# Allegro board Medical_Ventilator_VA.brd
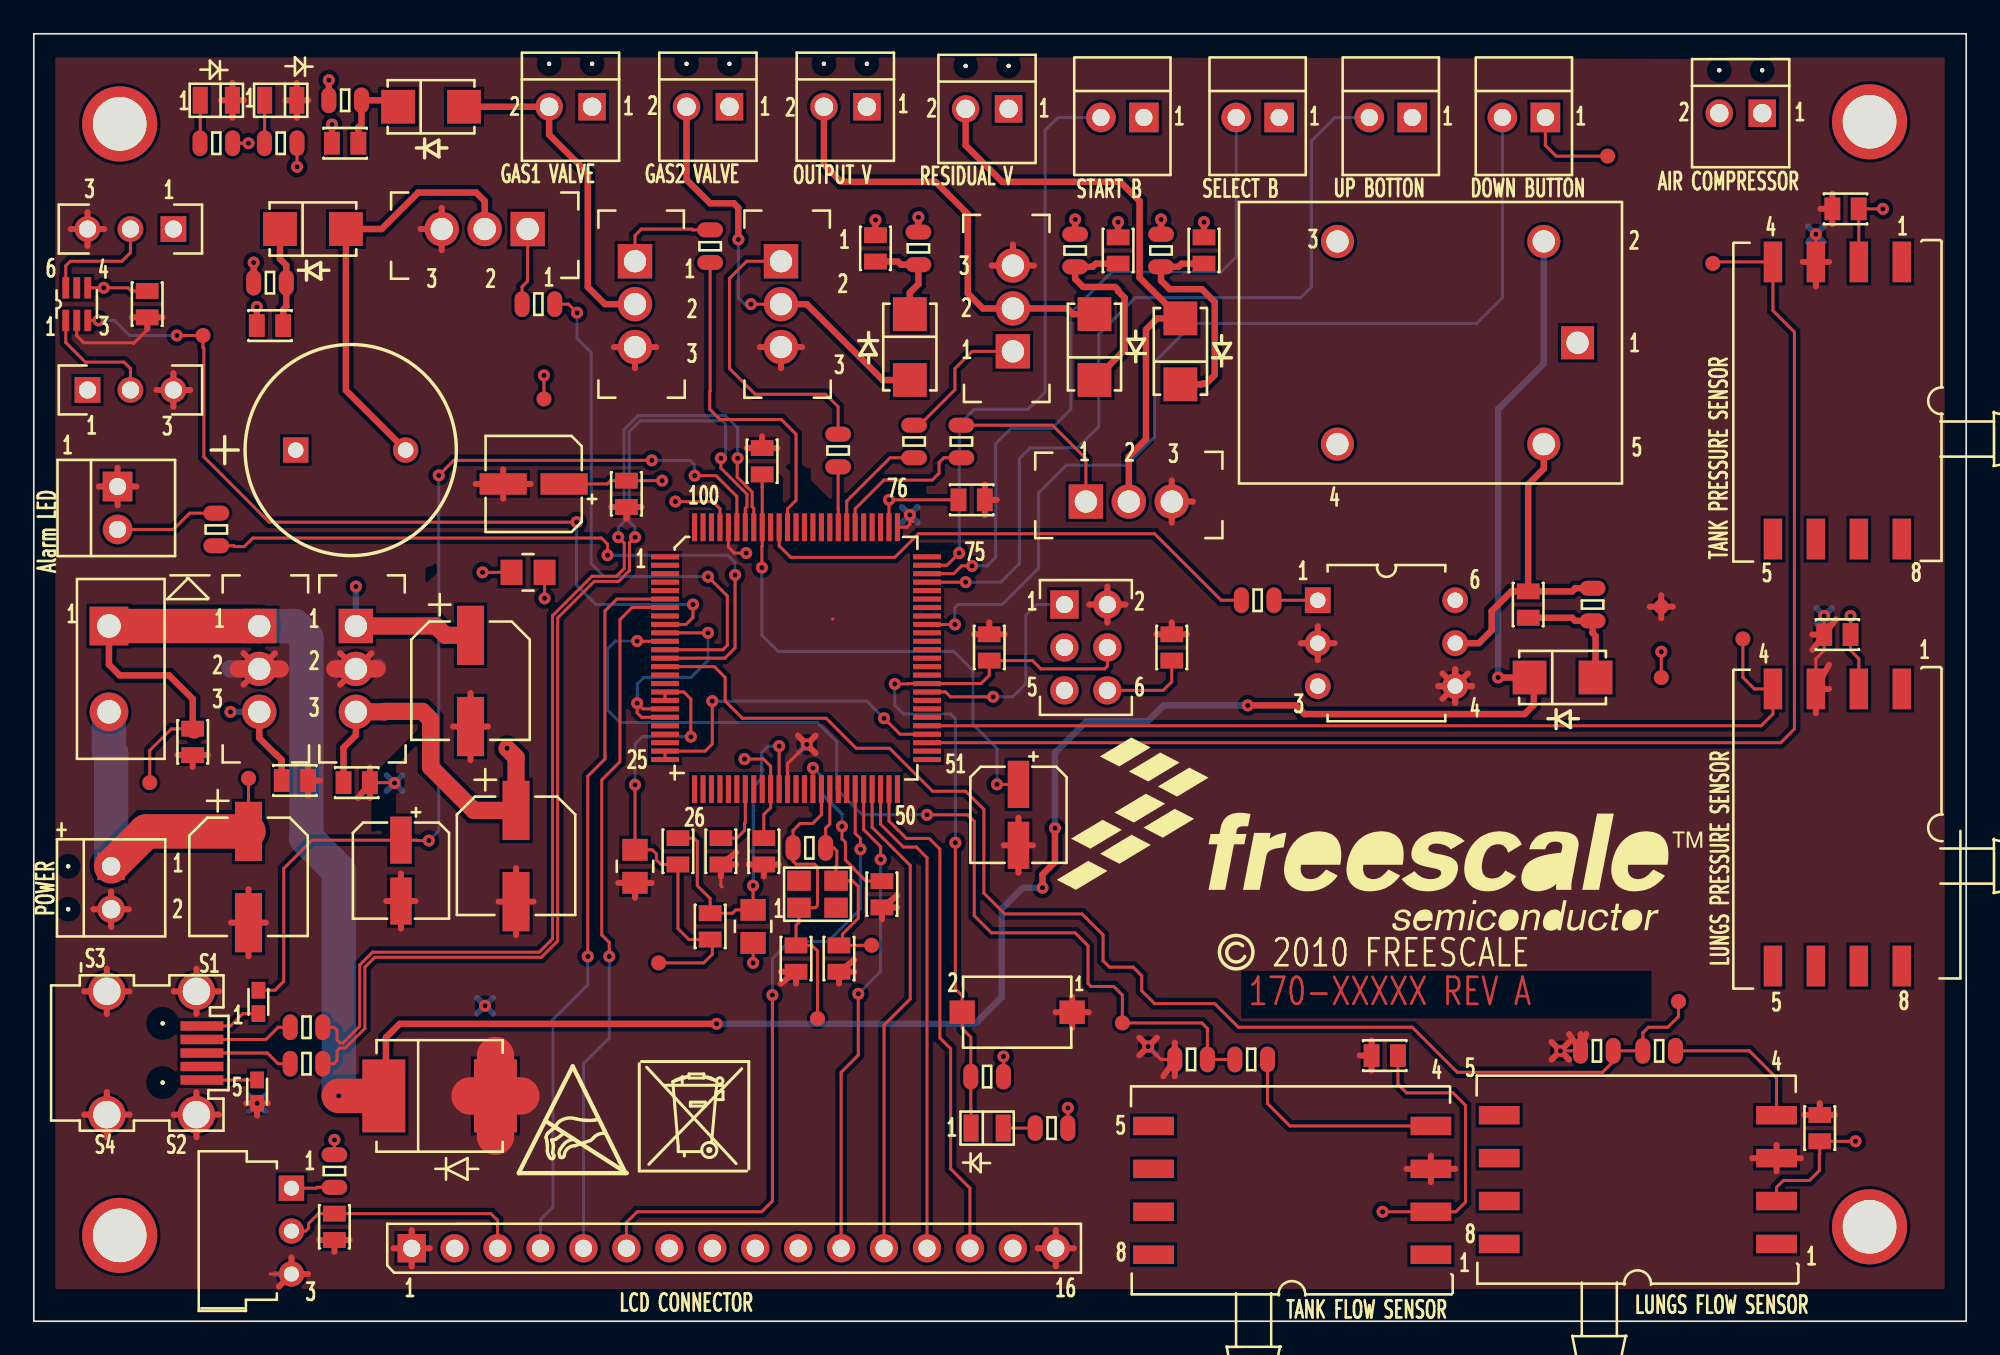
[diagram p0: board, top side]
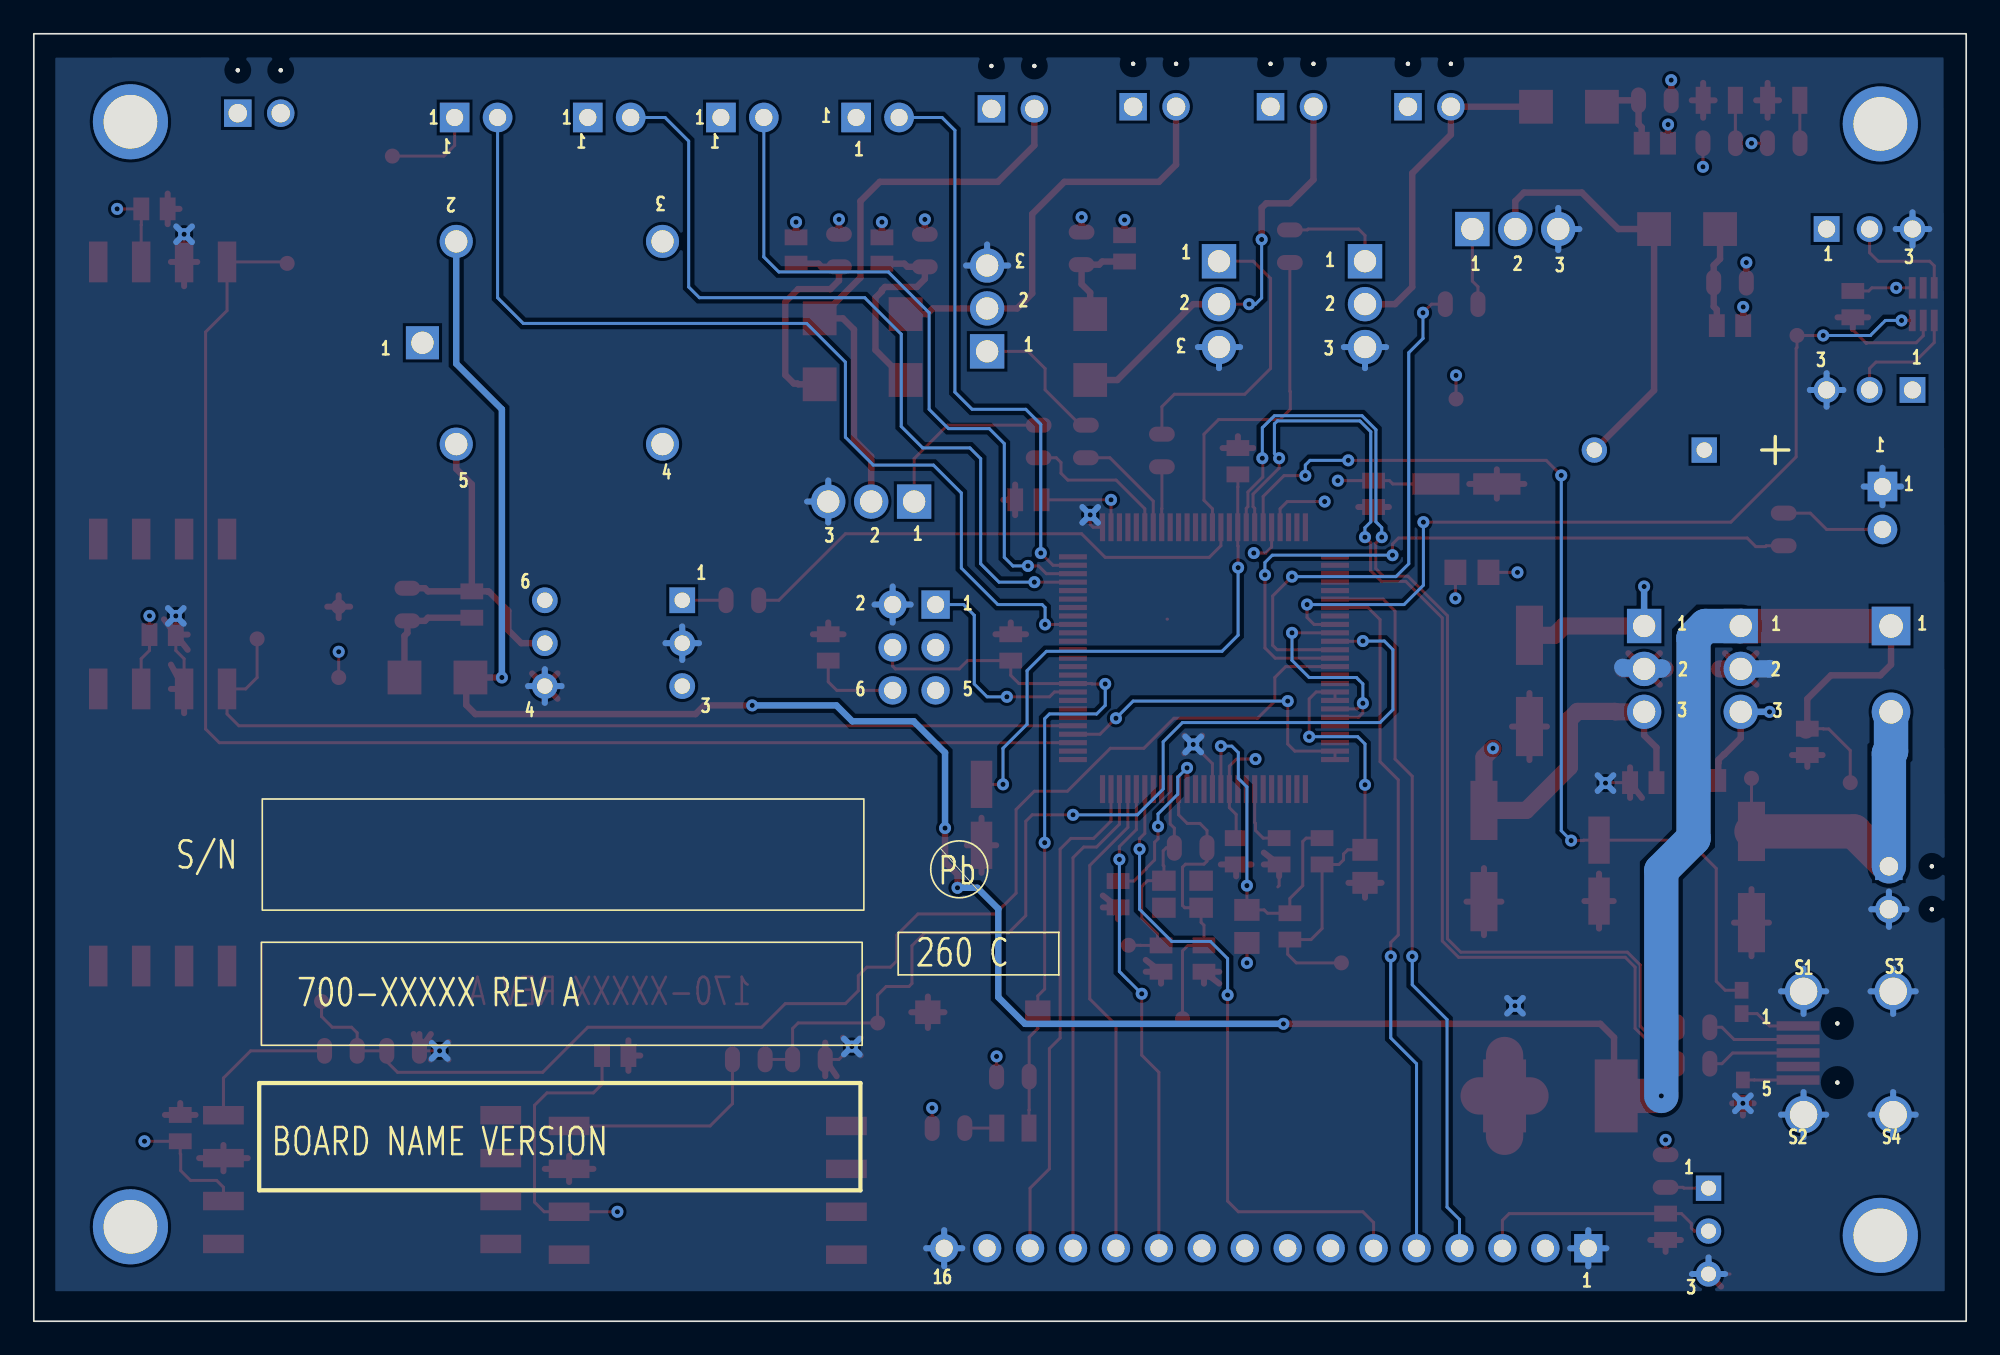
[diagram p1: board, bottom side, seen from below]

Outline 114.3 x 76.2 mm; copper layers: TOP, L2_PWR, L3_PWR, BOTTOM. Coordinates in mm from the lower left corner of the outline.
Outline path: rectangle 0,0 114.3,76.2

## Design rules (mm)
net group DP1: nets USB_IDM USB_IDP

## Placement (name value [footprint] x y rotation side)
BH1  MOUNT_HOLE  [MH175-125P]  108.59 5.59 0 top
BH2  MOUNT_HOLE  [MH175-125P]  5.08 5.08 0 top
BH3  MOUNT_HOLE  [MH175-125P]  108.59 70.99 0 top
BH4  MOUNT_HOLE  [MH175-125P]  5.08 70.87 0 top
C1  47uF  [CCE63X55]  12.7 26.29 270 top
C2  0.1uF  [0805_CC]  15.44 32 0 top
C3  0.1uF  [0805_CC]  19.1 31.88 0 top
C4  10uF  [CCE50X54]  29.57 49.56 180 top
C5  0.1uF  [0805_CC]  55.47 48.62 0 top
C6  0.1uF  [0805_CC]  50.16 25.27 270 top
C7  0.1uF  [0805_CC]  35.05 48.97 270 top
C8  0.1uF  [0805_CC]  40 23.37 270 top
C9  0.01uF  [0805_CC]  38.1 27.81 270 top
C10  0.1uF  [0805_CC]  56.52 39.88 90 top
C11  12pF  [0805_CC]  45.09 21.46 270 top
C12  12pF  [0805_CC]  47.62 21.46 90 top
C13  47uF  [CCE63X55]  25.83 37.9 270 top
C14  47uF  [CCE63X55]  28.52 27.53 270 top
C15  0.1uF  [0805_CC]  9.4 34.29 270 top
C16  0.1uF  [0805_CC]  17.78 5.59 270 top
C17  0.1uF  [0805_CC]  67.31 39.88 90 top
C19  4.7uF  [CCE50X54]  58.24 29.97 270 top
C20  0.1uF  [0805_CC]  43.18 27.81 270 top
C21  0.1uF  [0805_CC]  40.64 27.81 90 top
C22  DNP  [0805_CC]  49.78 63.5 270 top
C23  DNP  [0805_CC]  69.22 63.37 270 top
C24  DNP  [0805_CC]  64.14 63.37 270 top
C25  DNP  [0805_CC]  18.42 69.72 0 top
C26  DNP  [0805_CC]  88.39 42.42 270 top
C27  DNP  [0805_CC]  13.97 58.93 0 top
C28  0.1uF  [0805_CC]  107.16 65.84 180 top
C29  0.1uF  [0805_CC]  106.68 40.64 180 top
C30  0.1uF  [0805_CC]  79.91 15.72 180 top
C31  0.1uF  [0805_CC]  6.71 60.2 270 top
C32  0.1uF  [0805_CC]  105.64 11.43 90 top
C34  4.7uF  [CCE50X54]  21.72 26.67 270 top
C35  0.47uF  [0805_CC]  43.08 50.9 90 top
D8  MBR0520L  [DO214AC_AK]  16.51 64.64 0 top
D9  MBR0520L  [DO214AC_AK]  23.5 71.88 0 top
D10  MBR0520L  [DO214AC_AK]  51.82 57.66 270 top
D11  MBR0520L  [DO214AC_AK]  67.82 57.4 90 top
D12  MBR0520L  [DO214AC_AK]  62.74 57.66 90 top
D13  MBR0520L  [DO214AC_AK]  90.42 38.1 0 top
D14  LED  [LED0805]  56.39 11.43 90 top
D15  LED  [LED0805]  10.79 72.26 270 top
D16  LED  [LED0805]  14.6 72.26 270 top
D17  LED  [HDR102_E]  4.95 49.4 90 top
D18  BYW29E-150  [TO-220-2TH]  4.45 41.15 270 top
D19  SCMJ13A  [DO214AB_SM]  24 13.34 270 top
J1  TB  [CONN_BLOCK_2POS]  4.57 26.92 0 top
J2  TB  [CONN_BLOCK_2POS]  57.66 71.75 270 top
J3  TB  [CONN_BLOCK_2POS]  49.28 71.88 270 top
J4  TB  [CONN_BLOCK_2POS]  41.15 71.88 270 top
J5  TB  [CONN_BLOCK_2POS]  33.02 71.88 270 top
J6  TB  [CONN_BLOCK_2POS]  102.23 71.5 270 top
J12  CON16  [HDR116]  22.35 4.32 90 top
J13  CON_HDR_3X2  [HDR203]  60.96 42.42 0 top
J14  Jumper 3Pin  [HDR103]  3.17 55.12 90 top
J15  Jumper 3Pin  [HDR103]  8.25 64.64 270 top
J16  USB_MINI_B_SKT  [CON_MINIUSB_B]  7.62 15.88 0 top
K1  JSM1_RELAY_5P  [RELAY5_22X16_TH]  91.31 57.91 180 top
L1  100MHZ  [IND_0805]  29.24 44.32 0 top
L2  100MHZ  [IND_0805]  42.54 23.37 270 top
L3  100MHZ  [IND_0805]  35.56 26.92 270 top
L4  260ohm  [IND_0603]  13.21 13.59 90 top
L5  260ohm  [IND_0603]  13.28 18.9 90 top
LS2  BUZZER  [BUZZER_6P5_12X3P8_TH]  15.49 51.56 0 top
NOREF  -  []  35.81 8.89 0 top
NOREF#2  -  []  28.7 9.53 0 top
NOREF#3  -  []  -368.3 -367.16 0 top
NOREF#4  -  []  5.08 1.78 0 top
NOREF#5  -  []  6.35 -36.96 0 top
NOREF#6  -  []  114.3 0 90 top
NOREF#7  -  []  -344.17 158.62 0 top
NOREF#8  -  []  1.63 21.01 328.7 top
NOREF#9  -  []  60.5 26.14 0 top
NOREF#10  -  []  0 76.2 0 top
NOREF#11  -  []  0.38 4.57 0 top
NOREF#12  -  []  71.25 21.97 0 top
NOREF#13  -  []  226.06 -161.42 0 top
NOREF#14  -  []  3.81 3.68 0 top
NOREF#15  -  []  100.97 7.75 180 bottom
Q1  TIPL31C  [TO-220]  62.23 48.51 0 top
Q2  TIPL31C  [TO-220]  57.91 57.4 90 top
Q3  TIPL31C  [TO-220]  44.2 62.74 270 top
Q4  TIPL31C  [TO-220]  35.56 62.74 270 top
Q5  TIPL31C  [TO-220]  29.21 64.64 180 top
R1  4.7K  [RC0805_OV]  56.39 14.48 180 top
R2  330  [RC0805_OV]  60.2 11.43 0 top
R3  1M  [RC0805_OV]  45.87 28.02 0 top
R4  470  [RC0805_OV]  54.86 52.07 90 top
R5  470  [RC0805_OV]  52.07 52.07 90 top
R6  470  [RC0805_OV]  47.57 51.54 90 top
R7  470  [RC0805_OV]  40 63.63 90 top
R8  180  [RC0805_OV]  72.39 42.67 0 top
R9  330  [RC0805_OV]  14.6 69.72 180 top
R10  220  [RC0805_OV]  10.79 69.72 180 top
R11  220  [RC0805_OV]  10.79 46.86 90 top
R12  470  [RC0805_OV]  29.85 60.2 180 top
R13  10K  [RC0805_OV]  17.78 8.89 270 top
R14  POT 10K  [POT3_3352W]  15.24 7.87 270 top
R15  170k  [RC0805_OV]  72.01 15.49 180 top
R16  330k  [RC0805_OV]  68.45 15.49 180 top
R17  0  [RC0805_OV]  52.32 63.5 270 top
R18  0  [RC0805_OV]  66.68 63.37 270 top
R19  0  [RC0805_OV]  61.59 63.37 270 top
R20  0  [RC0805_OV]  18.42 72.26 0 top
R21  0  [RC0805_OV]  92.2 42.42 270 top
R22  0  [RC0805_OV]  13.97 61.47 0 top
R23  170k  [RC0805_OV]  96.14 16 180 top
R24  330k  [RC0805_OV]  92.46 16 180 top
R25  33  [RC0805_OV]  16.13 15.24 180 top
R26  33  [RC0805_OV]  16.13 17.4 180 top
SW1  SW2_STM151XX  [SW2_6P5_6X4]  58.17 18.29 180 top
SW2  SW2_STM151XX  [HDR102_E]  89.41 71.25 0 top
SW3  SW2_STM151XX  [HDR102_E]  81.53 71.25 0 top
SW4  SW2_STM151XX  [HDR102_E]  73.66 71.25 0 top
SW5  SW2_STM151XX  [HDR102_E]  65.66 71.25 0 top
TP18  TEST_POINT  [TESTPOINT_35MIL]  46.35 17.91 0 top
TP19  TEST_POINT  [TESTPOINT_35MIL]  49.56 22.25 0 top
TP20  TEST_POINT  [TESTPOINT_35MIL]  12.7 32.13 0 top
TP21  TEST_POINT  [TESTPOINT_35MIL]  6.86 31.88 0 top
TP22  TEST_POINT  [TESTPOINT_35MIL]  96.27 38.1 0 top
TP23  TEST_POINT  [TESTPOINT_35MIL]  93.09 68.96 0 top
TP24  TEST_POINT  [TESTPOINT_35MIL]  30.18 54.58 0 top
TP25  TEST_POINT  [TESTPOINT_35MIL]  36.96 21.21 0 top
TP26  TEST_POINT  [TESTPOINT_35MIL]  96.27 42.29 0 top
TP27  TEST_POINT  [TESTPOINT_35MIL]  10.01 58.34 0 top
TP28  TEST_POINT  [TESTPOINT_35MIL]  101.09 40.39 0 top
TP29  TEST_POINT  [TESTPOINT_35MIL]  99.31 62.61 0 top
TP30  TEST_POINT  [TESTPOINT_35MIL]  64.39 17.65 0 top
TP31  TEST_POINT  [TESTPOINT_35MIL]  97.28 18.92 0 top
U2  MCF51MM256  [LQFP100_0P5_14X14]  45.09 39.24 0 top
U5  L78S05CV  [TO-220]  13.33 41.15 270 top
U6  TLV2217  [TO-220]  19.05 41.15 270 top
U10  MP3V5050GP  [8PINS_2P54_SM]  106.68 54.48 180 top
U11  MPXV7025DP  [8PINS_2P54_SM]  74.42 7.75 90 top
U12  MP3V5050GP  [8PINS_2P54_SM]  106.68 29.21 180 top
U13  LM94021BIMG  [SC70_6]  2.54 60.2 90 top
U15  4N27M  [DIP6_320]  75.95 42.67 0 top
U16  MPXV7025DP  [8PINS_2P54_SM]  94.87 8.38 90 top
Y2  XTAL_13Y  [XTLOSC4_3P2X2P5MM_SM]  46.35 25.27 0 top

## Library data of the parts
BH1-BH4 = MOUNT_HOLE
C1 C4 C13 C14 C19 C34 = CAP_POL
C2 C3 C5-C12 C15-C17 C20-C32 C35 = MOT_CAP
D8-D13 = DIODE
D14-D17 = LED
D18 = MUR860
D19 = DIODE_TVS
J1-J6 = TB
J12 = CON16
J13 = CON_HDR_3X2
J14 J15 = Jumper 3Pin
J16 = USB_MINI_B_SKT
K1 = JSM1_RELAY_5P
L1-L3 = CDRH5D16NP-4R7N
L4 L5 = INDUCTOR
LS2 = SPEAKER
Q1-Q5 = TIPL751
R1-R13 R15-R26 = RES
R14 = POT
SW1-SW5 = SW2_STM151XX
TP18-TP31 = TEST_POINT: Tolerance: TOLERANCE; User Part Number: USERPART#
U2 = MCF51MM256
U5 U6 = 78XX/TO_1
U10 U12 = MPXV5050GP
U11 U16 = MPXV7025DP
U13 = LM94021_1
U15 = 4N27M
Y2 = XTAL_13Y

## Footprints (pads in the part's own frame, mm; a bottom-side part is the same pattern mirrored in y, then rotated)
8PINS_2P54_SM
  rect 1.092x2.413 smd: 1(-3.81,-8.214) 2(-1.27,-8.214) 3(1.27,-8.214) 4(3.81,-8.214) 5(3.81,8.189) 6(1.27,8.189) 7(-1.27,8.189) 8(-3.81,8.189)
0805_CC
  rect 0.94x1.346 smd: 1(-0.78,0) 2(0.78,0)
BUZZER_6P5_12X3P8_TH
  rect 1.499x1.499 hole 0.914: 1(0,0)
  round 1.499 hole 0.914: 2(6.5,0)
CCE50X54
  rect 2.794x1.27 smd: 1(-1.803,0) 2(1.803,0)
CCE63X55
  rect 3.505x1.6 smd: 1(-2.7,0) 2(2.7,0)
CON_MINIUSB_B
  round 0.254 hole 0.914 unplated: (0,1.75) (0,-1.75)
  rect 2.54x0.559 smd: 1(2.324,1.6) 2(2.324,0.8) 3(2.324,0) 4(2.324,-0.8) 5(2.324,-1.6)
  round 2.21 hole 1.626: S1(1.999,3.65) S2(1.999,-3.65) S3(-3.299,3.65) S4(-3.299,-3.65)
CONN_BLOCK_2POS
  round 0.254 hole 1.092 unplated: (-2.54,0) (-2.54,-2.54)
  rect 1.626x1.626 hole 1.092: 1(0,0)
  round 1.626 hole 1.092: 2(0,-2.54)
DIP6_320
  rect 1.524x1.524 hole 0.914: 1(0,0)
  round 1.524 hole 0.914: 2(0,-2.54) 3(0,-5.08) 4(8.128,-5.08) 5(8.128,-2.54) 6(8.128,0)
DO214AB_SM
  rect 4.318x2.54 smd: 1(0,-3.302) 2(0,3.302)
DO214AC_AK
  rect 1.999x1.999 smd: 1(-1.951,0) 2(1.951,0)
HDR102_E
  rect 1.753x1.753 hole 1.016: 1(0,0)
  round 1.753 hole 1.016: 2(-2.54,0)
HDR103
  rect 1.524x1.524 hole 1.016: 1(0,0)
  round 1.524 hole 1.016: 2(0,-2.54) 3(0,-5.08)
HDR116
  rect 1.676x1.676 hole 1.016: 1(0,0)
  round 1.676 hole 1.016: 2(0,-2.54) 3(0,-5.08) 4(0,-7.62) 5(0,-10.16) 6(0,-12.7) 7(0,-15.24) 8(0,-17.78) 9(0,-20.32) 10(0,-22.86) 11(0,-25.4) 12(0,-27.94) 13(0,-30.48) 14(0,-33.02) 15(0,-35.56) 16(0,-38.1)
HDR203
  rect 1.676x1.676 hole 1.016: 1(0,0)
  round 1.676 hole 1.016: 2(2.54,0) 3(0,-2.54) 4(2.54,-2.54) 5(0,-5.08) 6(2.54,-5.08)
IND_0603
  rect 0.991x0.813 smd: 1(-0.691,0) 2(0.691,0)
IND_0805
  rect 1.295x1.499 smd: 1(-0.978,0) 2(0.978,0)
LED0805
  rect 1.6x0.889 smd: 1(0,0.953) 2(0,-0.953)
LQFP100_0P5_14X14
  rect 1.651x0.305 smd: 1(-7.75,5.999) 2(-7.75,5.499) 3(-7.75,5.001) 4(-7.75,4.501) 5(-7.75,4) 6(-7.75,3.5) 7(-7.75,3) 8(-7.75,2.499) 9(-7.75,1.999) 10(-7.75,1.501) 11(-7.75,1.001) 12(-7.75,0.5) 13(-7.75,0) 14(-7.75,-0.5) 15(-7.75,-1.001) 16(-7.75,-1.501) 17(-7.75,-1.999) 18(-7.75,-2.499) 19(-7.75,-3) 20(-7.75,-3.5) 21(-7.75,-4) 22(-7.75,-4.501) 23(-7.75,-5.001) 24(-7.75,-5.499) 25(-7.75,-5.999) 51(7.75,-5.999) 52(7.75,-5.499) 53(7.75,-5.001) 54(7.75,-4.501) 55(7.75,-4) 56(7.75,-3.5) 57(7.75,-3) 58(7.75,-2.499) 59(7.75,-1.999) 60(7.75,-1.501) 61(7.75,-1.001) 62(7.75,-0.5) 63(7.75,0) 64(7.75,0.5) 65(7.75,1.001) 66(7.75,1.501) 67(7.75,1.999) 68(7.75,2.499) 69(7.75,3) 70(7.75,3.5) 71(7.75,4) 72(7.75,4.501) 73(7.75,5.001) 74(7.75,5.499) 75(7.75,5.999)
  rect 0.305x1.651 smd: 26(-5.999,-7.75) 27(-5.499,-7.75) 28(-5.001,-7.75) 29(-4.501,-7.75) 30(-4,-7.75) 31(-3.5,-7.75) 32(-3,-7.75) 33(-2.499,-7.75) 34(-1.999,-7.75) 35(-1.501,-7.75) 36(-1.001,-7.75) 37(-0.5,-7.75) 38(0,-7.75) 39(0.5,-7.75) 40(1.001,-7.75) 41(1.501,-7.75) 42(1.999,-7.75) 43(2.499,-7.75) 44(3,-7.75) 45(3.5,-7.75) 46(4,-7.75) 47(4.501,-7.75) 48(5.001,-7.75) 49(5.499,-7.75) 50(5.999,-7.75) 76(5.999,7.75) 77(5.499,7.75) 78(5.001,7.75) 79(4.501,7.75) 80(4,7.75) 81(3.5,7.75) 82(3,7.75) 83(2.499,7.75) 84(1.999,7.75) 85(1.501,7.75) 86(1.001,7.75) 87(0.5,7.75) 88(0,7.75) 89(-0.5,7.75) 90(-1.001,7.75) 91(-1.501,7.75) 92(-1.999,7.75) 93(-2.499,7.75) 94(-3,7.75) 95(-3.5,7.75) 96(-4,7.75) 97(-4.501,7.75) 98(-5.001,7.75) 99(-5.499,7.75) 100(-5.999,7.75)
MH175-125P
  round 4.445 hole 3.175: 1(0,0)
POT3_3352W
  rect 1.499x1.499 hole 0.889: 1(0,0)
  round 1.499 hole 0.889: 2(2.54,0) 3(5.08,0)
RC0805_OV
  oval 0.889x1.524 smd: 1(-0.965,0) 2(0.965,0)
RELAY5_22X16_TH
  rect 1.956x1.956 hole 1.321: 1(0,0)
  round 1.956 hole 1.321: 2(1.999,-5.999) 3(14.201,-5.999) 4(14.201,5.999) 5(1.999,5.999)
SC70_6
  rect 1.27x0.406 smd: 1(-0.965,0.65) 2(-0.965,0) 3(-0.965,-0.65) 4(0.965,-0.65) 5(0.965,0) 6(0.965,0.65)
SW2_6P5_6X4
  rect 1.499x1.397 smd: 1(-3.251,0) 2(3.251,0)
TESTPOINT_35MIL
  round 0.889 smd: 1(0,0)
TO-220
  rect 2.032x2.032 hole 1.321: 1(0,0)
  round 2.032 hole 1.321: 2(2.54,0) 3(5.08,0)
TO-220-2TH
  rect 2.286x2.286 hole 1.397: 1(0,0)
  round 2.286 hole 1.397: 3(5.08,0)
XTLOSC4_3P2X2P5MM_SM
  rect 1.397x1.194 smd: 1(-1.1,-0.8) 2(1.1,-0.8) 3(1.1,0.8) 4(-1.1,0.8)

## Nets
3.3V: C3.1 C14.1 C27.1 C28.1 C29.1 C31.1 J14.1(PIN1) J15.1(PIN1) L1.1 LS2.1 R2.2 R10.1 R22.1 SW2.1(SW1) SW3.1(SW1) SW4.1(SW1) SW5.1(SW1) TP23.1 U6.3(VOUT) U10.2(VS) U12.2(VS) U13.4(VDD)
3VDPS: R15.2 R16.1 TP30.1 U2.11(PTA4/INP1+)
3VDPS2: R23.2 R24.1 TP31.1 U2.14(PTA7/INP2+)
5V: C2.1 C13.1 C22.1 C23.1 C24.1 C25.1 C30.1 C32.1 J2.1 J3.1 J4.1 J5.1 J12.2 J12.15 R9.1 R13.1 R17.1 R18.1 R19.1 R20.1 TP22.1 U5.3(VOUT) U6.1(VIN) U11.2(VS) U16.2(VS)
12V: C15.1 D13.1(CATHODE) D18.1(CATHODE) D19.1(C) K1.2(COIL1) TP21.1 U5.1(VIN)
GND_FIELD SIGNAL: C8.2 C9.2 L3.1 TP25.1 U2.17(VSSA) U2.18(VREFL)
GND_POWER: C1.2 C2.2 C3.2 C4.2 C5.2 C6.2 C7.2 C10.2 C11.2 C12.1 C13.2 C14.2 C15.2 C16.2 C17.2 C19.2 C20.2 C21.1 C28.2 C29.2 C30.2 C31.2 C32.2 C34.2 C35.2 D15.1(CATHODE) D16.1(CATHODE) D17.1(CATHODE) D19.2(A) J1.2 J12.1 J12.16 J13.2 J14.3(PIN3) J15.3(PIN3) J16.S1(SHLD1) J16.S2(SHLD2) J16.S3(SHLD3) J16.S4(SHLD4) L3.2 L4.1 Q1.3(E) Q2.3(E) Q3.3(E) Q4.3(E) Q5.3(E) R14.3(B) R16.2 R24.2 SW1.1(SW1) TP26.1 U2.37(VSS2) U2.76(VSS3) U2.96(VSS1) U5.2(GND) U6.2(GND) U10.3(GND) U11.3(GND) U12.3(GND) U13.2(GND) U15.2(CATHODE) U15.4(EMITTER) U16.3(GND)
V0: C16.1 J12.3 R14.2(WIPER)
VBAT: C1.1 D18.3(ANODE) J1.1 TP20.1
2: Y2.2
4: Y2.4
ALARM: R11.1 U2.13(PTA6)
BKGD: J13.1 U2.59(PTD0/BKGD/MS)
BUTTON1: SW2.2(SW2) U2.67(PTE0/KBI2P3/FB_ALE/FB_CS1)
BUTTON2: SW3.2(SW2) U2.72(PTE1/KBI2P4/RGPIOP13/FB_AD6)
BUTTON3: SW4.2(SW2) U2.73(PTE2/KBI2P5/RGPIOP14/FB_AD7)
BUTTON4: SW5.2(SW2) U2.74(PTE3/KBI2P6/FB_AD8)
BUZZ: R12.1 U2.12(PTA5)
COMPR: R8.1 U2.90(PTF4/SDA/FB_D4/FB_AD10)
DB4: J12.11 U2.46(PTH3/RGPIOP3/FB_D6)
DB5: J12.12 U2.47(PTH4/RGPIOP4/FB_D5)
DB6: J12.13 U2.48(PTH5/RGPIOP5/FB_D4)
DB7: J12.14 U2.49(PTH6/RGPIOP6/FB_D3)
DPS: U2.10(PTA3/KBI1P2/FB_D6/ADP5) U2.19(INP1-) U2.20(OUT1)
DPS2: U2.24(INP2-) U2.25(OUT2) U2.54(PTC3/KBI1P6/SS2/ADP7)
E: J12.6 U2.45(PTH2/RGPIOP2/FB_D7)
EXTAL2: C11.1 R3.1 TP18.1 U2.41(PTB4/EXTAL2) Y2.1
GAS1: R4.1 U2.81(PTF0/USB_ID/TPM2CH2)
GAS2: R5.1 U2.82(PTF1/RX2/USB_DP_DOWN/TPM2CH1)
GS0: J14.2(PIN2) U13.1(GS0)
GS1: J15.2(PIN2) U13.6(GS1)
MCU 3.3V: C4.1 C5.1 C6.1 C7.1 C17.1 C20.1 J13.6 L1.2 L2.2 R1.1 TP24.1 U2.35(VREFH) U2.40(VDD2) U2.77(VDD3) U2.97(VDD1)
MCU_RESET: C10.1 D14.1(CATHODE) J13.4 R1.2 SW1.2(SW2) U2.60(PTD1/CMPP2/RESET)
OUTPUT: R6.1 U2.83(PTF2/TX2/USB_DM_DOWN/TPM2CH0)
P1S: TP29.1 U2.53(PTC2/KBI1P5/SPSCK2/ADP6) U10.4(VOUT)
P2S: TP28.1 U2.55(PTC4/KBI1P7/CMPP0/ADP8) U12.4(VOUT)
R/W: J12.5 U2.7(PTH1/FB_D0)
RESIDUAL: R7.1 U2.89(PTF3/SCL/FB_D5/FB_AD11)
RS: J12.4 U2.6(PTH0/FB_OE_B)
TEMP: TP27.1 U2.9(PTA2/KBI1P1/RX1/ADP4) U13.3(OUT)
USB_IDM: R26.1 U2.93(USB_DM)
USB_IDP: R25.1 U2.94(USB_DP)
V_USB_BUS: C34.1 L5.2 U2.95(VBUS)
VUSB33: C19.1 C35.1 U2.92(VUSB33)
XTAL2: C12.2 R3.2 TP19.1 U2.42(PTB5/XTAL2) Y2.3
N07061: C8.1 C9.1 L2.1 U2.36(VDDA)
N11863: Q1.1(B) R4.2
N11999: D11.2(ANODE) J2.2 Q1.2(C)
N12118: Q2.1(B) R5.2
N12172: D12.2(ANODE) J3.2 Q2.2(C)
N12672: Q3.1(B) R6.2
N12726: D10.2(ANODE) J4.2 Q3.2(C)
N12762: Q4.1(B) R7.2
N12800: D9.2(ANODE) J5.2 Q4.2(C)
N13430: R8.2 U15.1(ANODE)
N14080: J6.1 K1.1(COMMON)
N16404: D17.2(ANODE) R11.2
N17031: Q5.1(B) R12.2
N18492: R15.1 U11.4(VOUT)
N6844012: R13.2 R14.1(A)
N6860008: C21.2 U2.32(VREFO)
N6863643: D8.2(ANODE) LS2.2 Q5.2(C)
N6899722: D14.2(ANODE) R2.1
N6899921: D15.2(ANODE) R10.2
N6900064: D16.2(ANODE) R9.2
N6911656: J6.2 K1.3(NO)
N6937956: C22.2 D10.1(CATHODE) R17.2
N6938317: C23.2 D11.1(CATHODE) R18.2
N6938790: C24.2 D12.1(CATHODE) R19.2
N6939061: C25.2 D9.1(CATHODE) R20.2
N6940286: C26.1 K1.5(COIL2) R21.1 U15.5(COLLECTOR)
N6940870: C26.2 D13.2(ANODE) R21.2
N6942152: C27.2 D8.1(CATHODE) R22.2
N6970603: R23.1 U16.4(VOUT)
N6984290: J16.3(D+) R25.2
N6984322: J16.2(D-) R26.2
N6984489: J16.5(GND1) L4.2
N6985280: J16.1(VBUS) L5.1

Pads without a net: BH1 1; BH2 1; BH3 1; BH4 1; J12 7 8 9 10; J13 3 5; J16 4; K1 4; U2 1 2 3 4 5 8 15 16 21 22 23 26 27 28 29 30 31 33 34 38 39 43 44 50 51 52 56 57 58 61 62 63 64 65 66 68 69 70 71 75 78 79 80 84 85 86 87 88 91 98 99 100; U10 1 5 6 7 8; U11 1 5 6 7 8; U12 1 5 6 7 8; U13 5; U15 3 6; U16 1 5 6 7 8

## Via types
v1: diameter 0.711, hole 0.305, TOP to BOTTOM, 93 vias

## Routing (per net, layer and track width the routed paths; a pad name or vN(x,y) marks a point on that pad's centre or on a via; arc(x,y) is an arc through that point)
3.3V: length 99.6
  TOP w0.178: C31.1 5.76,60.98 5.58,61.16 v1(4.14,61.16) U13.4 ; R2.2 v1(61.16,12.62) ; v1(109.37,65.84) C28.1 107.94,64.89 107.95,64.89 U10.2 ; U12.2 107.95,39.21 107.46,39.7 C29.1 v1(107.46,41.74) ; R10.1 v1(12.7,69.72) ; L1.1 v1(26.54,44.32) ; TP23.1 90.04,68.96 89.41,69.6 SW2.1
  TOP w0.381: R22.1 v1(13,62.66) ; C27.1 v1(13.19,60.03) ; C3.1 18.32,33.95 19.05,34.68 U6.3
  TOP w1.016: U6.3 20.75,36.07 20.78,36.09 22.99,36.09 23.47,35.61 23.47,32.79 26.03,30.23 C14.1 28.52,33.38 v1(27.99,33.91)
  L2_PWR w0.178: 8.25,63.65 J15.1 ; J15.1 9.25,64.64 ; J15.1 7.26,64.64 ; J15.1 8.25,65.64 ; 12.54,62.2 v1(13,62.66) ; v1(13,62.66) 13.47,63.13 ; v1(13,62.66) 12.54,63.13 ; v1(13,62.66) 13.47,62.2 ; 80.43,71.25 SW3.1 ; SW3.1 81.53,70.14 ; SW3.1 82.64,71.25 ; SW3.1 81.53,72.35 ; 26.08,44.79 v1(26.54,44.32) ; v1(26.54,44.32) 27.01,44.79 ; v1(26.54,44.32) 26.08,43.86 ; v1(26.54,44.32) 27.01,43.86 ; 108.91,65.37 v1(109.37,65.84) ; v1(109.37,65.84) 109.84,66.3 ; v1(109.37,65.84) 108.91,66.3 ; v1(109.37,65.84) 109.84,65.37 ; J14.1 3.17,56.11 ; J14.1 2.18,55.12 ; J14.1 3.17,54.12 ; J14.1 4.17,55.12 ; SW5.1 65.66,72.35 ; SW5.1 65.66,70.14 ; SW5.1 64.55,71.25 ; SW5.1 66.77,71.25 ; 27.53,33.44 v1(27.99,33.91) ; v1(27.99,33.91) 27.53,34.37 ; v1(27.99,33.91) 28.46,33.44 ; v1(27.99,33.91) 28.46,34.37 ; 3.68,61.63 v1(4.14,61.16) ; v1(4.14,61.16) 3.68,60.7 ; v1(4.14,61.16) 4.61,61.63 ; v1(4.14,61.16) 4.61,60.7 ; v1(13.19,60.03) 13.66,60.5 ; v1(13.19,60.03) 13.66,59.57 ; v1(13.19,60.03) 12.73,60.5 ; v1(13.19,60.03) 12.73,59.57 ; SW4.1 73.66,72.35 ; SW4.1 73.66,70.14 ; SW4.1 74.77,71.25 ; SW4.1 72.55,71.25 ; 12.24,70.19 v1(12.7,69.72) ; v1(12.7,69.72) 12.24,69.26 ; v1(12.7,69.72) 13.16,69.26 ; v1(12.7,69.72) 13.16,70.19 ; v1(107.46,41.74) 107.92,42.21 ; v1(107.46,41.74) 106.99,41.28 ; v1(107.46,41.74) 106.99,42.21 ; v1(107.46,41.74) 107.92,41.28 ; 15.49,50.58 LS2.1 ; LS2.1 16.47,51.56 ; LS2.1 15.49,52.54 ; LS2.1 14.51,51.56 ; 88.3,71.25 SW2.1 ; SW2.1 89.41,72.35 ; SW2.1 90.52,71.25 ; SW2.1 89.41,70.14 ; 60.7,13.09 v1(61.16,12.62) ; v1(61.16,12.62) 61.63,13.09 ; v1(61.16,12.62) 60.7,12.16 ; v1(61.16,12.62) 61.63,12.16
3VDPS: length 61.2
  TOP w0.178: v1(52.83,29.97) 55.24,29.97 55.63,29.59 55.63,24 56.64,22.99 61.59,22.99 62.36,22.22 62.36,19.99 62.53,19.81 63.88,19.81 64.39,19.3 TP30.1 69.09,17.65 69.42,17.32 R16.1 R15.2 ; v1(35.69,40.26) 35.7,40.24 U2.11
  BOTTOM w0.178: v1(35.69,40.26) 34.42,40.26 33.91,39.75 33.91,36.2 34.67,35.43 46.35,35.43 47.5,34.29 47.5,31.5 49.02,29.97 v1(52.83,29.97)
3VDPS2: length 78.3
  TOP w0.178: U2.14 40.25,38.74 40.89,38.1 40.89,36.7 41.91,35.69 46.86,35.69 48.64,33.91 50.62,33.91 53.16,31.37 55.12,31.37 56.2,30.29 56.2,25.34 57.43,24.1 62,24.1 63.25,22.86 63.25,21.34 63.63,20.95 65.02,20.95 65.53,20.45 65.53,19.56 66.29,18.8 69.85,18.8 71.25,17.4 81.53,17.4 84.2,14.73 92.79,14.73 93.42,15.37 R24.1 R23.2 95.17,17.07 95.5,17.4 96.65,17.4 97.28,18.03 TP31.1
5V: length 122.7
  TOP w0.178: TP22.1 v1(96.27,39.62) ; R9.1 v1(15.57,68.33) ; R13.1 v1(17.78,10.73) ; v1(79.78,6.48) U11.2 84.11,6.48 84.68,7.05 84.68,12.78 83.95,13.51 81.2,13.51 80.69,14.03 C30.1 ; v1(107.75,10.65) C32.1 105.64,9.91 105.61,9.89 105.61,8.92 105.03,8.33 103.49,8.33 103.08,7.93 U16.2
  TOP w0.381: R20.1 v1(17.45,73.46) ; C23.1 v1(69.22,65.05) ; R18.1 v1(66.68,65.21) ; R17.1 v1(52.32,65.34) ; C22.1 v1(49.78,65.18) ; R19.1 v1(61.59,65.21) ; C2.1 14.66,33.05 14.66,33.06 14.66,33.22 14.33,33.55 14.3,33.55 13.33,34.52 U5.3 ; C24.1 v1(64.14,65.05) ; C25.1 v1(17.64,70.83)
  TOP w1.016: C13.1 24.35,40.6 23.79,41.15 U6.1
  L3_PWR w0.178: v1(49.78,65.18) 50.25,65.65 ; v1(49.78,65.18) 50.25,64.72 ; v1(49.78,65.18) 49.32,65.65 ; v1(49.78,65.18) 49.32,64.72 ; 56.61,71.75 J2.1 ; J2.1 57.66,70.71 ; J2.1 58.7,71.75 ; J2.1 57.66,72.8 ; v1(79.78,6.48) 80.25,6.94 ; v1(79.78,6.48) 79.32,6.94 ; v1(79.78,6.48) 79.32,6.01 ; v1(79.78,6.48) 80.25,6.01 ; v1(66.68,65.21) 67.14,65.68 ; v1(66.68,65.21) 67.14,64.75 ; v1(66.68,65.21) 66.21,65.68 ; v1(66.68,65.21) 66.21,64.75 ; v1(19.05,43.48) 19.51,43.95 ; v1(19.05,43.48) 18.59,43.02 ; v1(19.05,43.48) 19.51,43.02 ; v1(19.05,43.48) 18.59,43.95 ; v1(17.45,73.46) 17.91,73.92 ; v1(17.45,73.46) 16.98,72.99 ; v1(17.45,73.46) 16.98,73.92 ; v1(17.45,73.46) 17.91,72.99 ; v1(107.75,10.65) 108.22,11.12 ; v1(107.75,10.65) 108.22,10.19 ; v1(107.75,10.65) 107.29,11.12 ; v1(107.75,10.65) 107.29,10.19 ; v1(96.27,39.62) 96.73,39.16 ; v1(96.27,39.62) 95.8,40.09 ; v1(96.27,39.62) 95.8,39.16 ; v1(96.27,39.62) 96.73,40.09 ; 63.67,64.59 v1(64.14,65.05) ; v1(64.14,65.05) 64.6,65.52 ; v1(64.14,65.05) 63.67,65.52 ; v1(64.14,65.05) 64.6,64.59 ; 40.1,71.88 J4.1 ; J4.1 42.19,71.88 ; J4.1 41.15,70.84 ; J4.1 41.15,72.93 ; v1(17.78,10.73) 18.24,11.2 ; v1(17.78,10.73) 17.32,11.2 ; v1(17.78,10.73) 17.32,10.27 ; v1(17.78,10.73) 18.24,10.27 ; J5.1 33.02,72.93 ; J5.1 31.98,71.88 ; J5.1 34.06,71.88 ; J5.1 33.02,70.84 ; v1(69.22,65.05) 69.68,64.59 ; v1(69.22,65.05) 68.75,64.59 ; v1(69.22,65.05) 68.75,65.52 ; v1(69.22,65.05) 69.68,65.52 ; 15.11,68.79 v1(15.57,68.33) ; v1(15.57,68.33) 15.11,67.86 ; v1(15.57,68.33) 16.04,68.79 ; v1(15.57,68.33) 16.04,67.86 ; U6.1 20.3,41.15 ; U6.1 17.8,41.15 ; U6.1 19.05,42.4 ; 61.13,65.68 v1(61.59,65.21) ; v1(61.59,65.21) 62.06,65.68 ; v1(61.59,65.21) 61.13,64.75 ; v1(61.59,65.21) 62.06,64.75 ; v1(17.64,70.83) 18.1,70.36 ; v1(17.64,70.83) 18.1,71.29 ; v1(17.64,70.83) 17.17,71.29 ; v1(17.64,70.83) 17.17,70.36 ; 57.91,3.25 J12.15 ; J12.15 58.98,4.32 ; J12.15 57.91,5.39 ; J12.15 56.84,4.32 ; 11.17,36.53 v1(11.63,36.07) ; v1(11.63,36.07) 11.17,35.6 ; v1(11.63,36.07) 12.1,36.53 ; v1(11.63,36.07) 12.1,35.6 ; J12.2 24.89,5.39 ; J12.2 23.82,4.32 ; J12.2 24.89,3.25 ; J12.2 25.96,4.32 ; 14.58,36.07 U5.3 13.33,34.82 ; v1(52.32,65.34) 52.79,65.81 ; v1(52.32,65.34) 51.86,65.81 ; v1(52.32,65.34) 51.86,64.88 ; v1(52.32,65.34) 52.79,64.88 ; J3.1 50.32,71.88 ; J3.1 48.23,71.88 ; J3.1 49.28,70.84 ; J3.1 49.28,72.93
  BOTTOM w0.381: U6.1 v1(19.05,43.48) ; U5.3 v1(11.63,36.07)
12V: length 175.3
  TOP w0.178: TP21.1 6.86,33.78 8.13,35.05 8.44,35.05 8.46,35.07 C15.1
  TOP w0.381: C15.1 9.4,36.83 8,38.23 5.08,38.23 4.45,38.86 D18.1 ; v1(71.81,36.45) 74.64,36.45 75.16,35.93 88.18,35.93 88.72,36.47 88.72,37.85 D13.1 v1(86.61,38.1) ; v1(60.4,29.18) 60.4,27.18 59.66,26.44 v1(59.66,25.65) ; v1(40.39,17.6) 21.64,17.6 20.83,16.79 20.83,13.46
  TOP w1.016: 20.83,13.46 D19.1 ; 9.48,34.99 C15.1
  TOP w2.032: D19.1 v1(18.03,13.34) ; D18.1 U5.1
  BOTTOM w0.381: K1.2 89.31,56.68 86.61,53.98 v1(86.61,38.1) ; v1(60.4,29.18) 60.4,33.66 62.26,35.51 65.89,35.51 66.83,36.45 v1(71.81,36.45) ; v1(59.66,25.65) 58.5,25.65 57.25,24.41 57.25,19.18 55.68,17.6 v1(40.39,17.6)
  BOTTOM w2.032: v1(18.03,13.34) 18.03,26.67 16.13,28.57 16.13,40.44 15.42,41.15 U5.1 13.35,41.14
GND_FIELD SIGNAL: length 27.6
  TOP w0.178: U2.18 U2.17 38.45,37.24 38.86,36.83 v1(38.86,34.59) ; TP25.1 39.62,21.21 40.13,21.72 40.13,22.46 C8.2 38.75,22.59 38.1,23.24 C9.2 37.1,27.03 36.83,27.3 36.83,27.65 36.58,27.9 L3.1 v1(35.56,31.75)
  BOTTOM w0.178: v1(38.86,34.59) 35.99,34.59 35.56,34.16 v1(35.56,31.75)
GND_POWER: length 369.3
  TOP w0.178: 51.99,47.32 51.82,47.5 ; 51.82,47.5 51.82,47.17 51.64,46.99 U2.76 ; 51.82,47.5 v1(51.82,47.73) ; v1(21.34,31.85) 21.31,31.88 C3.2 ; v1(105.9,41.74) C29.2 105.9,39.7 105.41,39.21 U12.3 ; 47.24,41.55 47.27,41.55 ; U2.37 44.58,33 v1(45.72,34.14) ; v1(42.14,45.47) 41.44,45.47 41.08,45.82 U2.96 ; 40.64,26.33 40.64,25.78 40.72,25.7 ; R16.2 66.68,15.49 v1(65.91,16.26) ; U10.3 v1(105.41,64.34) ; U13.2 2.54,58.33 2.96,57.91 5.89,57.91 5.91,57.89 ; 6.71,58.72 6.71,58.68 5.91,57.89 ; R24.2 v1(90.3,16) ; 5.91,57.89 5.89,57.89 ; 13.97,2.79 R14.3
  TOP w0.356: 56.66,62.48 Q2.3 ; Q2.3 57.91,63.73 ; Q2.3 59.16,62.48 ; C28.2 106.38,66.74 ; C28.2 105.68,65.84 ; C28.2 106.38,64.93 ; J16.S3 5.66,19.52 ; J16.S3 4.32,20.86 ; J16.S3 2.98,19.52 ; J16.S3 4.32,18.19 ; 89.78,15.48 v1(90.3,16) ; v1(90.3,16) 90.82,15.48 ; v1(90.3,16) 89.78,16.52 ; v1(90.3,16) 90.82,16.52 ; TP26.1 96.94,42.29 ; TP26.1 95.59,42.29 ; TP26.1 96.27,41.62 ; TP26.1 96.27,42.97 ; 6.71,58.72 C31.2 ; C31.2 5.8,59.42 ; C31.2 7.61,59.42 ; 27.49,24.83 C14.2 ; C14.2 28.52,26.82 ; C14.2 28.52,22.85 ; C14.2 29.56,24.83 ; 18.12,39.54 U6.2 ; U6.2 18.12,37.68 ; U6.2 19.98,39.54 ; 34.31,57.66 Q4.3 ; Q4.3 35.56,56.41 ; Q4.3 36.81,57.66 ; U16.3 103.08,10.43 ; U16.3 101.65,9.65 ; U16.3 104.52,9.65 ; U16.3 103.08,8.87 ; 14.5,2.05 R14.3 ; R14.3 16.22,2.79 ; R14.3 15.24,3.77 ; 45.2,34.66 v1(45.72,34.14) ; v1(45.72,34.14) 46.24,33.62 ; v1(45.72,34.14) 46.24,34.66 ; 24.8,35.2 C13.2 ; C13.2 26.86,35.2 ; C13.2 25.83,33.21 ; C13.2 25.83,37.18 ; 83.32,38.34 U15.4 ; U15.4 83.32,36.84 ; U15.4 84.83,38.34 ; 4.95,48.3 D17.1 ; D17.1 4.95,50.51 ; D17.1 6.06,49.4 ; D17.1 3.85,49.4 ; U10.3 106.19,62.7 ; U10.3 105.41,61.26 ; U10.3 104.63,62.7 ; 42.17,51.68 C35.2 ; C35.2 43.08,52.38 ; C35.2 43.98,51.68 ; C34.2 22.58,24.87 ; C34.2 21.72,23.24 ; C34.2 20.85,24.87 ; C34.2 21.72,26.49 ; 22.35,3.25 J12.1 ; J12.1 22.35,5.39 ; J12.1 23.42,4.32 ; J12.1 21.28,4.32 ; 9.62,10.89 J16.S2 ; J16.S2 9.62,13.56 ; J16.S2 10.96,12.23 ; J16.S2 8.28,12.23 ; v1(65.91,16.26) 66.43,16.78 ; v1(65.91,16.26) 65.39,16.78 ; v1(65.91,16.26) 65.39,15.74 ; J16.S4 5.66,12.23 ; J16.S4 2.98,12.23 ; J16.S4 4.32,13.56 ; J16.S4 4.32,10.89 ; 2.18,64.64 J15.3 ; J15.3 4.17,64.64 ; J15.3 3.17,63.65 ; J15.3 3.17,65.64 ; 66.41,40.66 C17.2 ; C17.2 68.21,40.66 ; C17.2 67.31,41.36 ; 44.2,56.41 Q3.3 ; Q3.3 42.95,57.66 ; Q3.3 45.44,57.66 ; C12.1 48.53,20.68 ; C12.1 47.62,19.98 ; C12.1 48.53,21.38 ; C3.2 19.88,32.78 ; C3.2 19.18,30.97 ; C3.2 19.88,30.97 ; 81.2,9.02 U11.3 ; U11.3 82.64,9.79 ; U11.3 84.07,9.02 ; U11.3 82.64,8.24 ; C20.2 44.08,27.03 ; C20.2 42.28,27.03 ; C20.2 43.18,26.33 ; 12.57,12.9 v1(13.21,12.9) ; v1(13.21,12.9) 13.85,12.9 ; v1(13.21,12.9) 13.21,12.17 ; U15.2 76.94,40.13 ; U15.2 75.95,41.13 ; U15.2 75.95,39.14 ; U15.2 74.95,40.13 ; 4.57,23.34 J1.2 ; J1.2 3.53,24.38 ; J1.2 5.62,24.38 ; J1.2 4.57,25.43 ; 11.75,71.23 D15.1 ; D15.1 11.75,73.29 ; D15.1 11.07,72.26 ; D15.1 12.42,72.26 ; 61.42,17.36 SW1.1 ; SW1.1 61.42,19.22 ; SW1.1 62.4,18.29 ; SW1.1 60.44,18.29 ; C1.2 13.73,23.59 ; C1.2 12.7,25.57 ; C1.2 11.67,23.59 ; C1.2 12.7,21.61 ; C19.2 59.11,28.17 ; C19.2 58.24,26.54 ; C19.2 58.24,29.8 ; C19.2 57.38,28.17 ; C21.1 41.54,27.03 ; C21.1 41.54,27.73 ; C21.1 40.64,26.33 ; 9.4,32.81 C15.2 ; C15.2 10.3,33.51 ; C15.2 8.49,33.51 ; U12.3 106.19,37.42 ; U12.3 106.19,38.86 ; U12.3 105.41,35.99 ; 67.49,14.5 R16.2 ; R16.2 66.81,14.5 ; R16.2 67.49,16.49 ; C32.2 105.64,12.91 ; C32.2 104.73,12.21 ; C32.2 106.54,12.21 ; C2.2 16.92,32 ; C2.2 16.22,31.1 ; C2.2 16.22,32.91 ; 26.13,49.56 C4.2 ; C4.2 27.76,48.69 ; C4.2 27.76,50.42 ; C4.2 29.39,49.56 ; 44.18,19.98 C11.2 ; C11.2 45.09,19.98 ; C11.2 44.18,20.68 ; Q1.3 67.31,49.76 ; Q1.3 67.31,47.27 ; Q1.3 68.56,48.51 ; C6.2 51.07,24.49 ; C6.2 51.07,25.19 ; C6.2 50.16,23.79 ; 35.05,47.49 C7.2 ; C7.2 34.15,48.19 ; C7.2 35.96,48.19 ; 12.4,37.68 U5.2 ; U5.2 12.4,39.54 ; U5.2 14.27,39.54 ; 90.82,17 R24.2 ; R24.2 91.49,17 ; R24.2 91.83,17 ; 62.43,42.42 J13.2 ; J13.2 64.57,42.42 ; J13.2 63.5,41.35 ; J13.2 63.5,43.49 ; 8.28,19.52 J16.S1 ; J16.S1 9.62,20.86 ; J16.S1 10.96,19.52 ; J16.S1 9.62,18.19 ; 7.26,55.12 J14.3 ; J14.3 9.25,55.12 ; J14.3 8.25,56.11 ; J14.3 8.25,54.12 ; J12.16 61.52,4.32 ; J12.16 59.38,4.32 ; J12.16 60.45,5.39 ; J12.16 60.45,3.25 ; 78.43,15.72 C30.2 ; C30.2 79.13,14.82 ; C30.2 79.13,16.63 ; 35.56,25.07 L3.2 ; L3.2 34.58,25.95 ; L3.2 36.54,25.95 ; C16.2 18.68,4.81 ; C16.2 16.88,4.81 ; C16.2 17.78,4.11 ; 24.13,63.4 Q5.3 ; Q5.3 22.88,64.64 ; Q5.3 24.13,65.89 ; 55.61,40.66 C10.2 ; C10.2 57.42,40.66 ; C10.2 56.52,41.36 ; D16.1 15.56,73.29 ; D16.1 15.56,71.23 ; D16.1 16.23,72.26 ; D16.1 14.88,72.26 ; 105.2,40.64 C29.2 ; C29.2 105.2,39.74 ; C29.2 106.6,41.54 ; C5.2 56.25,49.52 ; C5.2 56.95,48.62 ; C5.2 56.25,47.71
  TOP w0.381: U15.4 83.08,37.59 ; U15.4 84.07,38.59 ; U15.4 85.07,37.59 ; U15.4 84.07,36.6
  TOP w1.016: 12.09,38.61 U5.2 14.58,38.61 ; 20.3,38.61 U6.2 17.8,38.61
  TOP w2.21: D19.2 27.3,15.73 ; D19.2 28.81,13.34 ; D19.2 27.3,10.94 ; D19.2 25.8,13.34
  BOTTOM w0.356: 105.44,41.28 v1(105.9,41.74) ; v1(105.9,41.74) 106.37,42.21 ; v1(105.9,41.74) 106.37,41.28 ; v1(105.9,41.74) 105.44,42.21 ; 51.35,48.19 v1(51.82,47.73) ; v1(51.82,47.73) 51.35,47.26 ; v1(51.82,47.73) 52.28,48.19 ; v1(51.82,47.73) 52.28,47.26 ; 45.26,33.67 v1(45.72,34.14) ; v1(45.72,34.14) 45.26,34.6 ; v1(45.72,34.14) 46.18,34.6 ; v1(45.72,34.14) 46.18,33.67 ; v1(65.91,16.26) 66.38,16.72 ; v1(65.91,16.26) 66.38,15.79 ; v1(65.91,16.26) 65.45,15.79 ; v1(65.91,16.26) 65.45,16.72 ; v1(105.41,64.34) 105.87,63.87 ; v1(105.41,64.34) 104.95,63.87 ; v1(105.41,64.34) 104.95,64.8 ; v1(105.41,64.34) 105.87,64.8 ; 8.28,12.23 J16.S2 ; J16.S2 9.62,10.89 ; J16.S2 10.96,12.23 ; J16.S2 9.62,13.56 ; J12.16 61.52,4.32 ; J12.16 60.45,3.25 ; J12.16 60.45,5.39 ; J12.16 59.38,4.32 ; 44.2,56.41 Q3.3 ; Q3.3 42.95,57.66 ; Q3.3 45.44,57.66 ; v1(21.34,31.85) 21.8,31.39 ; v1(21.34,31.85) 20.87,31.39 ; v1(21.34,31.85) 20.87,32.32 ; v1(21.34,31.85) 21.8,32.32 ; 34.31,57.66 Q4.3 ; Q4.3 36.81,57.66 ; Q4.3 35.56,56.41 ; J13.2 64.57,42.42 ; J13.2 63.5,43.49 ; J13.2 63.5,41.35 ; J13.2 62.43,42.42 ; U15.4 85.07,37.59 ; U15.4 83.08,37.59 ; U15.4 84.07,36.6 ; U15.4 84.07,38.59 ; J16.S4 5.66,12.23 ; J16.S4 4.32,13.56 ; J16.S4 4.32,10.89 ; J16.S4 2.98,12.23 ; J15.3 3.17,65.64 ; J15.3 3.17,63.65 ; J15.3 2.18,64.64 ; J15.3 4.17,64.64 ; v1(90.3,16) 90.76,15.54 ; v1(90.3,16) 90.76,16.47 ; v1(90.3,16) 89.83,15.54 ; v1(90.3,16) 89.83,16.47 ; 2.98,19.52 J16.S3 ; J16.S3 4.32,20.86 ; J16.S3 4.32,18.19 ; J16.S3 5.66,19.52 ; 3.85,49.4 D17.1 ; D17.1 6.06,49.4 ; D17.1 4.95,48.3 ; D17.1 4.95,50.51 ; v1(13.21,12.9) 13.67,13.36 ; v1(13.21,12.9) 12.74,13.36 ; v1(13.21,12.9) 12.74,12.43 ; v1(13.21,12.9) 13.67,12.43 ; 21.28,4.32 J12.1 ; J12.1 22.35,5.39 ; J12.1 23.42,4.32 ; J12.1 22.35,3.25 ; 56.66,62.48 Q2.3 ; Q2.3 57.91,63.73 ; Q2.3 59.16,62.48 ; J14.3 9.25,55.12 ; J14.3 7.26,55.12 ; J14.3 8.25,54.12 ; J14.3 8.25,56.11 ; 22.88,64.64 Q5.3 ; Q5.3 24.13,63.4 ; Q5.3 24.13,65.89 ; 67.31,47.27 Q1.3 ; Q1.3 68.56,48.51 ; Q1.3 67.31,49.76 ; J1.2 4.57,25.43 ; J1.2 3.53,24.38 ; J1.2 4.57,23.34 ; J1.2 5.62,24.38 ; R14.3 15.24,3.77 ; R14.3 14.26,2.79 ; R14.3 16.22,2.79 ; U15.2 75.95,41.13 ; U15.2 74.95,40.13 ; U15.2 75.95,39.14 ; U15.2 76.94,40.13 ; 8.28,19.52 J16.S1 ; J16.S1 9.62,18.19 ; J16.S1 10.96,19.52 ; J16.S1 9.62,20.86 ; 26.22,18.2 v1(26.69,18.67) ; v1(26.69,18.67) 27.15,19.13 ; v1(26.69,18.67) 26.22,19.13 ; v1(26.69,18.67) 27.15,18.2
  BOTTOM w1.016: 19.05,38.58 U6.2 18.03,38.61 17.98,38.66 20.27,38.66 20.32,38.71 ; 11.61,38.63 11.63,38.61 U5.2 13.36,38.61
V0: length 14.6
  TOP w0.178: R14.2 16.08,5.33 16.26,5.51 16.26,5.79 16.84,6.37 C16.1 27.03,6.37 27.43,5.97 J12.3
VBAT: length 21.3
  TOP w0.178: C1.1 TP20.1
  TOP w2.032: J1.1 6.64,28.99 C1.1
  BOTTOM w2.032: J1.1 4.57,33.6 4.45,33.73 D18.3
ALARM: length 41.4
  TOP w0.178: U2.13 40.87,39.24 41.48,39.85 v1(41.48,44.17) ; v1(33.93,45.34) 33.93,46 33.58,46.36 12.95,46.36 12.45,45.85 11.88,45.85 11.83,45.9 10.79,45.9
  BOTTOM w0.178: v1(41.48,44.17) 41.48,44.91 41.05,45.34 v1(33.93,45.34)
BKGD: length 12.9
  TOP w0.178: v1(56.74,36.96) 54.22,36.96 53.93,37.24 U2.59
  BOTTOM w0.178: J13.1 59.31,42.42 58.67,41.78 58.67,37.72 57.91,36.96 v1(56.74,36.96)
BUTTON1: length 58.5
  TOP w0.178: U2.67 v1(54.48,41.24)
  BOTTOM w0.178: SW2.2 86.87,60.58 85.34,59.05 68.58,59.05 66.29,56.77 66.29,52.32 64.64,50.67 61.09,50.67 59.44,49.02 59.44,44.58 57.28,42.42 54.66,42.42 54.48,42.24 v1(54.48,41.24)
BUTTON2: length 49.5
  TOP w0.178: U2.72 v1(55.12,43.74)
  BOTTOM w0.178: v1(55.12,43.74) 57.21,43.74 58.29,44.83 58.29,51.05 58.93,51.69 61.72,51.69 62.99,52.96 62.99,58.42 65.15,60.58 74.93,60.58 75.56,61.21 75.56,69.85 76.96,71.25 SW3.2
BUTTON3: length 41.6
  TOP w0.178: v1(55.5,44.7) 54.87,44.7 54.41,44.24 U2.73
  BOTTOM w0.178: SW4.2 71.12,62.99 70.23,62.1 63.75,62.1 61.34,59.69 61.34,53.98 60.2,52.83 57.78,52.83 56.9,51.94 56.9,45.21 56.39,44.7 v1(55.5,44.7)
BUTTON4: length 34.8
  TOP w0.178: v1(54.74,45.47) 54.01,44.74 U2.74
  BOTTOM w0.178: SW5.2 60.58,71.25 59.82,70.48 59.82,54.99 58.8,53.98 55.63,53.98 54.74,53.09 v1(54.74,45.47)
BUZZ: length 32.3
  TOP w0.178: v1(39.88,44.07) 41.02,42.93 41.02,40.01 40.76,39.74 U2.12 ; v1(32.13,59.69) 31.62,60.2 R12.1
  BOTTOM w0.178: v1(32.13,59.69) 32.13,58.17 32.97,57.33 32.97,44.83 33.73,44.07 v1(39.88,44.07)
COMPR: length 30.9
  TOP w0.178: R8.1 70.23,42.67 66.29,46.61 52.32,46.61 50.93,45.21 44.77,45.21 44.08,45.9 U2.90
DB4: length 28.6
  TOP w0.178: J12.11 47.75,14.73 48.77,15.75 v1(48.77,19.38) ; v1(50.09,27.33) 50.09,28.09 49.09,29.1 U2.46
  BOTTOM w0.178: v1(48.77,19.38) 50.09,20.7 v1(50.09,27.33)
DB5: length 28.8
  TOP w0.178: J12.12 50.29,17.53 51.84,19.08 51.84,26.97 49.59,29.23 U2.47
DB6: length 28.8
  TOP w0.178: U2.48 50.09,29.42 51.43,28.07 52.2,28.07 52.83,27.43 J12.13
DB7: length 29.9
  TOP w0.178: J12.14 55.37,7.87 54.23,9.02 54.23,16.13 53.59,16.76 53.59,27.94 52.96,28.57 51.61,28.57 50.58,29.6 U2.49
DPS: length 14.2
  TOP w0.178: U2.10 v1(39.88,40.74) ; U2.20 35.95,35.74 35.69,36 v1(35.69,36.58) 36.02,36.24 U2.19
  BOTTOM w0.178: v1(35.69,36.58) 35.69,37.72 36.07,38.1 38.86,38.1 39.88,39.12 v1(39.88,40.74)
DPS2: length 19.5
  TOP w0.178: v1(50.29,35.69) 51.24,34.74 U2.54 ; v1(40.13,36.7) 40.13,34.16 39.71,33.74 U2.24 U2.25
  BOTTOM w0.178: v1(50.29,35.69) 49.28,36.7 v1(40.13,36.7)
E: length 38.7
  TOP w0.178: v1(48.89,27.94) 48.89,28.56 48.59,28.87 U2.45 ; J12.6 35.05,5.84 35.69,6.48 43.05,6.48 43.69,7.11 v1(43.69,19.3)
  BOTTOM w0.178: v1(48.89,27.94) 48.89,24.38 46.99,22.48 44.7,22.48 43.69,21.46 v1(43.69,19.3)
EXTAL2: length 18.1
  TOP w0.178: U2.41 46.59,30.4 46.58,30.4 46.58,29.97 46.08,29.46 45.32,29.46 44.91,29.05 R3.1 44.91,27.23 45.09,27.05 46.18,27.05 46.35,26.87 46.35,24.6 46.22,24.47 Y2.1 45.26,23.61 45.09,23.44 C11.1 46.03,22.24 46.35,21.92 TP18.1
GAS1: length 9
  TOP w0.178: U2.81 48.59,48.09 50.28,49.78 53.14,49.78 53.54,50.19 53.54,50.83 53.82,51.1 R4.1
GAS2: length 6.6
  TOP w0.178: U2.82 48.08,48.54 50.65,51.1 R5.1
GS0: length 7
  TOP w0.178: J14.2 5.72,56.39 5.33,56.77 3.05,56.77 1.89,57.93 U13.1
GS1: length 6.8
  TOP w0.178: U13.6 1.89,62.47 2.16,62.74 5.21,62.74 5.72,63.25 J15.2
MCU 3.3V: length 73
  TOP w0.178: U2.77 v1(50.58,48.62) C5.1 ; U2.40 v1(46.09,32.75) ; v1(37.95,48.51) 40.16,48.51 40.58,48.09 U2.97 ; v1(47.8,29.29) 47.8,28.55 48.01,28.35 48.01,27.3 48.5,26.81 48.5,26.78 49.22,26.05 C6.1 ; R1.1 v1(57.35,15.67) ; L1.2 v1(30.21,42.79) ; C20.1 43.18,29.99 43.58,30.4 U2.35 43.58,32.85 43.16,33.27 v1(42.04,33.27) ; J13.6 66.8,37.34 67.31,37.85 C17.1 ; TP24.1 v1(30.18,55.98) ; v1(37.17,49.75) C7.1 34.11,49.75 33.91,49.56 C4.1 ; L2.2 v1(42.54,21.21)
  L2_PWR w0.178: 41.57,33.74 v1(42.04,33.27) ; v1(42.04,33.27) 41.57,32.81 ; v1(42.04,33.27) 42.5,33.74 ; v1(42.04,33.27) 42.5,32.81 ; 63.5,36.27 J13.6 ; J13.6 62.43,37.34 ; J13.6 63.5,38.41 ; J13.6 64.57,37.34 ; 47.34,28.82 v1(47.8,29.29) ; v1(47.8,29.29) 48.27,29.75 ; v1(47.8,29.29) 47.34,29.75 ; v1(47.8,29.29) 48.27,28.82 ; 37.48,48.05 v1(37.95,48.51) ; v1(37.95,48.51) 37.48,48.98 ; v1(37.95,48.51) 38.41,48.98 ; v1(37.95,48.51) 38.41,48.05 ; v1(42.54,21.21) 43.01,20.74 ; v1(42.54,21.21) 43.01,21.67 ; v1(42.54,21.21) 42.08,21.67 ; v1(42.54,21.21) 42.08,20.74 ; v1(37.17,49.75) 37.63,49.29 ; v1(37.17,49.75) 36.7,49.29 ; v1(37.17,49.75) 36.7,50.22 ; v1(37.17,49.75) 37.63,50.22 ; v1(46.09,32.75) 46.55,32.29 ; v1(46.09,32.75) 45.62,32.29 ; v1(46.09,32.75) 45.62,33.22 ; v1(46.09,32.75) 46.55,33.22 ; 50.12,48.15 v1(50.58,48.62) ; v1(50.58,48.62) 50.12,49.08 ; v1(50.58,48.62) 51.05,48.15 ; v1(50.58,48.62) 51.05,49.08 ; 29.71,55.52 v1(30.18,55.98) ; v1(30.18,55.98) 29.71,56.45 ; v1(30.18,55.98) 30.64,55.52 ; v1(30.18,55.98) 30.64,56.45 ; v1(57.35,15.67) 57.82,16.14 ; v1(57.35,15.67) 56.89,16.14 ; v1(57.35,15.67) 57.82,15.21 ; v1(57.35,15.67) 56.89,15.21 ; v1(30.21,42.79) 30.68,42.32 ; v1(30.21,42.79) 29.75,42.32 ; v1(30.21,42.79) 30.68,43.25 ; v1(30.21,42.79) 29.75,43.25
  BOTTOM w0.178: v1(46.09,32.75) 46.63,32.2 46.63,31.19 47.8,30.02 v1(47.8,29.29)
MCU_RESET: length 44.8
  TOP w0.178: v1(50.93,37.72) 51.72,37.72 51.74,37.74 U2.60 56.03,37.74 56.52,38.23 C10.1 59.07,39.1 59.56,38.61 63.34,38.61 63.5,38.77 J13.4 ; v1(54.51,28.32) 54.51,19.66 54.91,19.26 SW1.2 54.91,17.32 55.42,16.81 R1.2 55.42,12.51 55.44,12.5 D14.1
  BOTTOM w0.178: v1(54.51,28.32) 54.51,35.66 54.23,35.94 51.43,35.94 50.93,36.45 v1(50.93,37.72)
OUTPUT: length 3.6
  TOP w0.178: R6.1 47.57,48.1 47.58,48.09 U2.83
P1S: length 83.4
  TOP w0.178: TP29.1 99.35,62.61 99.44,62.7 U10.4 102.87,59.82 104.14,58.55 104.14,35.05 103.33,34.24 U2.53
P2S: length 56.2
  TOP w0.178: TP28.1 101.09,38.1 101.77,37.42 U12.4 102.87,35.94 102.17,35.24 U2.55
R/W: length 41.4
  TOP w0.178: v1(34.04,21.59) 34.04,22.42 33.59,22.86 33.59,32.04 34.67,33.12 34.67,41.53 35.38,42.24 U2.7
  BOTTOM w0.178: v1(34.04,21.59) 34.04,16.76 32.51,15.24 J12.5
RESIDUAL: length 20.1
  TOP w0.178: U2.89 44.58,48.09 45.09,48.59 45.09,52.5 44.22,53.37 40.59,53.37 39.98,53.98 39.98,55.02 40,55.04 R7.1
RS: length 43.1
  TOP w0.178: U2.6 34.49,42.74 33.78,42.04 33.78,33.27 32.77,32.26 v1(32.77,21.59)
  BOTTOM w0.178: v1(32.77,21.59) 32.77,19.91 30.71,17.86 30.71,6.76 29.97,6.02 J12.4
TEMP: length 51.7
  TOP w0.178: U13.3 v1(3.83,59.23) ; U2.9 38.57,41.24 38.99,41.66 v1(38.99,42.42) ; v1(8.46,58.34) TP27.1 10.01,57.63 10.06,57.58 10.06,51.16 13.92,47.29 v1(32.11,47.29)
  BOTTOM w0.178: v1(32.11,47.29) 32.11,43.56 33.25,42.42 v1(38.99,42.42) ; v1(3.83,59.23) 4.78,59.23 5.66,58.34 v1(8.46,58.34)
USB_IDM: length 65.7
  TOP w0.178: R26.1 17.75,17.4 17.93,17.22 17.93,16.65 18.11,16.47 18.29,16.47 19.28,17.46 19.28,21.08 20.04,21.84 29.9,21.84 30.68,22.63 30.68,41.76 33.02,44.09 34.47,44.09 34.92,44.55 34.92,46.05 v1(34.57,46.41) ; U2.93 42.59,48.11 42.49,48.21 42.49,49.08 41.61,49.96 41.61,51.05 v1(41.63,51.08)
  BOTTOM w0.178: v1(41.63,51.08) 41.63,52.88 40.92,53.59 35.74,53.59 34.91,52.77 34.91,47.31 34.57,46.97 v1(34.57,46.41)
USB_IDP: length 65.3
  TOP w0.178: v1(35.56,46.41) 35.23,46.07 35.23,44.42 34.59,43.79 33.15,43.79 30.99,41.63 30.99,22.5 30.02,21.54 20.17,21.54 19.58,20.95 19.58,17.34 18.42,16.17 18.11,16.17 17.93,15.99 17.93,15.42 17.75,15.24 R25.1 ; v1(40.64,51.08) 40.64,50.5 42.18,48.95 42.18,48.21 42.09,48.12 U2.94
  BOTTOM w0.178: v1(40.64,51.08) 40.92,51.36 40.92,53.11 40.74,53.29 35.86,53.29 35.22,52.64 35.22,47.31 35.56,46.97 v1(35.56,46.41)
V_USB_BUS: length 60.6
  TOP w0.178: U2.95 41.58,48.81 40.35,50.05 v1(39.09,50.05) ; v1(23.95,50.06) 24.84,50.95 v1(36.55,50.95) ; L5.2 14.25,19.59 14.78,20.12 14.78,26.8 16.46,28.47 C34.1 22.62,28.47 22.65,28.45 v1(23.37,28.45)
  BOTTOM w0.178: v1(23.37,28.45) 23.95,29.03 v1(23.95,50.06) ; v1(39.09,50.05) 39.09,50.67 38.81,50.95 v1(36.55,50.95)
VUSB33: length 31.5
  TOP w0.178: v1(43.07,44.6) 43.07,45.88 43.09,45.9 U2.92 43.09,49.38 43.08,49.38 C35.1 ; C19.1 v1(56.97,31.78)
  BOTTOM w0.178: v1(56.97,31.78) 56.97,33.91 55.55,35.33 55.55,38.51 54.41,39.65 44.02,39.65 43.07,40.6 v1(43.07,44.6)
XTAL2: length 13.4
  TOP w0.178: 47.83,22.24 48.84,22.24 48.84,22.25 TP19.1 ; 47.83,22.24 47.83,22.91 48.77,23.85 48.77,25.73 48.42,26.07 Y2.3 47.45,26.94 47.5,26.98 47.5,27.84 47.32,28.02 R3.2 46.84,29.18 47.08,29.43 U2.42 ; 47.83,22.24 C12.2
N07061: length 21.7
  TOP w0.178: v1(42.54,25.78) L2.1 41.53,24.35 41.33,24.15 C8.1 40,25.02 39.24,25.78 39.24,28.39 39.04,28.59 C9.1 ; U2.36 v1(44.08,34.04)
  BOTTOM w0.178: v1(42.54,25.78) 42.54,31.62 43.05,32.13 43.05,33.66 43.43,34.04 v1(44.08,34.04)
N11863: length 10.7
  TOP w0.178: Q1.1 62.23,51.05 60.25,53.04 R4.2
N11999: length 34.7
  TOP w0.381: Q1.2 64.77,51.18 65.79,52.2 65.79,58.69 66.45,59.35 D11.2 65.41,61.77 65.41,66.29 64.26,67.44 57.28,67.44 55.12,69.6 J2.2
N12118: length 8.4
  TOP w0.178: Q2.1 55.5,57.4 54.48,56.39 54.48,55.13 52.39,53.04 R5.2
N12172: length 25.8
  TOP w0.381: J3.2 46.74,68.45 47.75,67.44 53.34,67.44 55.24,65.53 55.24,60.83 56.13,59.94 Q2.2 61.13,59.94 61.47,59.61 D12.2
N12672: length 17.8
  TOP w0.178: Q3.1 42.16,62.74 41.15,61.72 41.15,56.39 42.67,54.86 46.84,54.86 47.57,54.13 R6.2
N12726: length 25.6
  TOP w0.178: v1(42.42,60.2) Q3.2
  TOP w0.381: v1(41.67,64.03) 41.67,65.9 41.4,66.17 40,66.17 38.61,67.56 J4.2 ; Q3.2 45.72,60.2 50.21,55.71 D10.2
  BOTTOM w0.178: v1(41.67,64.03) 41.67,60.56 42.04,60.2 v1(42.42,60.2)
N12762: length 6.1
  TOP w0.178: Q4.1 35.56,64.26 35.94,64.64 38.92,64.64 38.97,64.59 R7.2
N12800: length 19.9
  TOP w0.381: Q4.2 33.78,60.2 32.77,61.21 32.77,67.94 30.48,70.23 J5.2 D9.2
N13430: length 2.6
  TOP w0.178: R8.2 U15.1
N16404: length 6.2
  TOP w0.178: D17.2 8.25,46.86 9.22,47.83 R11.2
N17031: length 4.6
  TOP w0.178: Q5.1 29.21,61.56 28.88,61.23 R12.2
N18492: length 12.8
  TOP w0.178: R15.1 72.97,12.88 74.3,11.56 U11.4
N6844012: length 2.6
  TOP w0.178: R14.1 16.7,7.87 16.75,7.92 R13.2
N6860008: length 4.1
  TOP w0.178: C21.2 41.58,28.59 42.04,29.05 42.04,29.46 42.09,29.51 U2.32
N6863643: length 25.5
  TOP w0.381: LS2.2 18.46,55.1 D8.2 20.57,64.64 22.73,66.8 26.16,66.8 26.67,66.29 Q5.2
N6899722: length 1.9
  TOP w0.178: D14.2 R2.1
N6899921: length 2.5
  TOP w0.178: D15.2 9.84,70.13 9.83,70.12 R10.2
N6900064: length 2.5
  TOP w0.178: R9.2 13.64,70.12 13.65,70.13 D16.2
N6937956: length 5.8
  TOP w0.381: C22.2 51.11,62.72 51.29,62.53 R17.2 52.32,61.39 51.82,60.88 D10.1
N6938317: length 13.7
  TOP w0.381: C23.2 67.89,62.59 67.71,62.41 R18.2 66.68,61.59 67.18,61.09 69.09,61.09 69.85,60.33 69.85,56.01 69.34,55.5 69.13,55.5 69.09,55.45 D11.1
N6938790: length 12.4
  TOP w0.381: D12.1 64.52,57.49 64.52,60.58 64.14,60.96 64.14,61.04 63.96,61.21 62.08,61.21 61.59,61.69 R19.2 62.63,62.41 62.81,62.59 C24.2
N6939061: length 4.9
  TOP w0.381: D9.1 21.16,72.26 R20.2 19.38,70.85 19.19,70.67 C25.2
N6940286: length 19.2
  TOP w0.381: R21.1 91.17,43.38 90.99,43.2 C26.1 ; K1.5 89.31,50.45 88.39,49.53 C26.1 ; U15.5 85.47,40.13 86.23,40.89 86.23,42.04 87.38,43.18 87.43,43.18 87.45,43.2 C26.1
N6940870: length 7.3
  TOP w0.381: D13.2 92.37,40.57 92.2,40.74 R21.2 91.17,41.45 90.99,41.64 C26.2
N6942152: length 5.9
  TOP w0.381: C27.2 14.75,59.87 14.94,60.06 R22.2 14.94,62.5 14.56,62.88 D8.1
N6970603: length 8.8
  TOP w0.178: R23.1 101.47,16 103.08,14.39 U16.4
N6984290: length 5.5
  TOP w0.178: R25.2 14.45,15.24 13.82,15.88 J16.3
N6984322: length 5.5
  TOP w0.178: R26.2 14.45,17.4 13.73,16.68 J16.2
N6984489: length 3.3
  TOP w0.178: J16.5 12.53,14.27 12.53,14.28 L4.2
N6985280: length 3.6
  TOP w0.178: L5.1 12.36,18.21 11.63,17.48 J16.1

## Copper pours and planes (outline as drawn; the poured copper is in the pictures)
3.3V on L2_PWR: 1.27,1.78 1.27,74.8 113.03,74.8 113.03,1.78
5V on L3_PWR: 1.47,1.78 1.47,74.8 112.75,74.8 112.75,1.78
GND_POWER on TOP: 1.27,74.8 1.27,1.91 113.03,1.91 113.03,74.8 ; 22 cut-outs
GND_POWER on BOTTOM: 1.27,1.78 1.27,74.8 113.03,74.8 113.03,1.78
MCU 3.3V on L2_PWR: 29.21,56.64 29.21,31.62 34.67,31.62 34.67,19.81 56.01,19.81 56.01,13.46 69.09,13.46 69.09,56.77
N14080 on L2_PWR: 85.93,44.17 85.93,62.66 91.54,62.66 91.54,74.8 105.99,74.8 105.99,66.98 100.76,66.98 100.76,44.17
N6911656 on L3_PWR: 71.53,68.78 71.53,53.42 100.69,53.42 100.69,67.01 106.3,67.01 106.3,74.65 90.83,74.65 90.83,68.78

## Text on the board
BOTTOM: 7 OF 10 | SECONDARY SIDE
Board Geometry/Soldermask Bottom: 8 OF 10 | SECONDARY SOLDERMASK
Ref Des/Silkscreen Bottom: BOARD NAME VERSION | 9 OF 10 | SECONDARY SILKSCREEN | Pb | 260 C | 700-XXXXX REV A
User.Comments: 1 OF 1 | TEST PROBE | 1/1 | 1
TOP: 4 OF 10 | PRIMARY SIDE | 170-XXXXX REV A
Board Geometry/Soldermask Top: 3 OF 10 | PRIMARY SOLDERMASK
Ref Des/Silkscreen Top: + | GAS1 VALVE | LCD CONNECTOR | GAS2 VALVE | OUTPUT V | RESIDUAL V | START B | SELECT B | TANK FLOW SENSOR | UP BOTTON | DOWN BUTTON | LUNGS FLOW SENSOR | AIR COMPRESSOR | POWER | Alarm LED | - | TANK PRESSURE SENSOR | LUNGS PRESSURE SENSOR | 2 OF 10 | PRIMARY SILKSCREEN
L2_PWR: 5 OF 10 | POWER PLANE
L3_PWR: 6 OF 10 | POWER PLANE
DIMENSION: PRIMARY DATUM | GRID ORIGIN | VIEW FROM PRIMARY SIDE
DISPLAY_TOP: 15. OVAL DRILLS COULD BE REPLACED BY SOME ROUND DRILLS WITH SAME DIAMETER ACORDING PWB CAPABILITIES | 17 | 16 | 8
User.5: 1 OF 10 | PRIMARY SOLDER PASTE
User.6: 10 OF 10 | SECONDARY SOLDER PASTE
User.24: FIGURE | SIZE | 12.0 | 35.0 | 36.0 | 40.0 | 43.0 | 52.0 | 55.0 | 64.0 | 125.0 | DRILL CHART: TOP to BOTTOM | ALL UNITS ARE IN MILS | TOLERANCE | +2.0/-2.0 | +3.0/-3.0 | +118.1/-118.1 | PLATED | NON-PLATED | QTY | 93 | 3 | 8 | 38 | 12 | 26 | 2 | 4
